# Altium PCB PCB.PcbDoc
Units mm, origin at the board's own origin, x right, y up, seen from the top; angles counter-clockwise.
Board outline 100 x 50 mm, 2 copper layers (Top Layer, Bottom Layer); 23 components, 20 nets, 52 pads, 0 vias.
Unrouted connection lines stored in the file: 32.
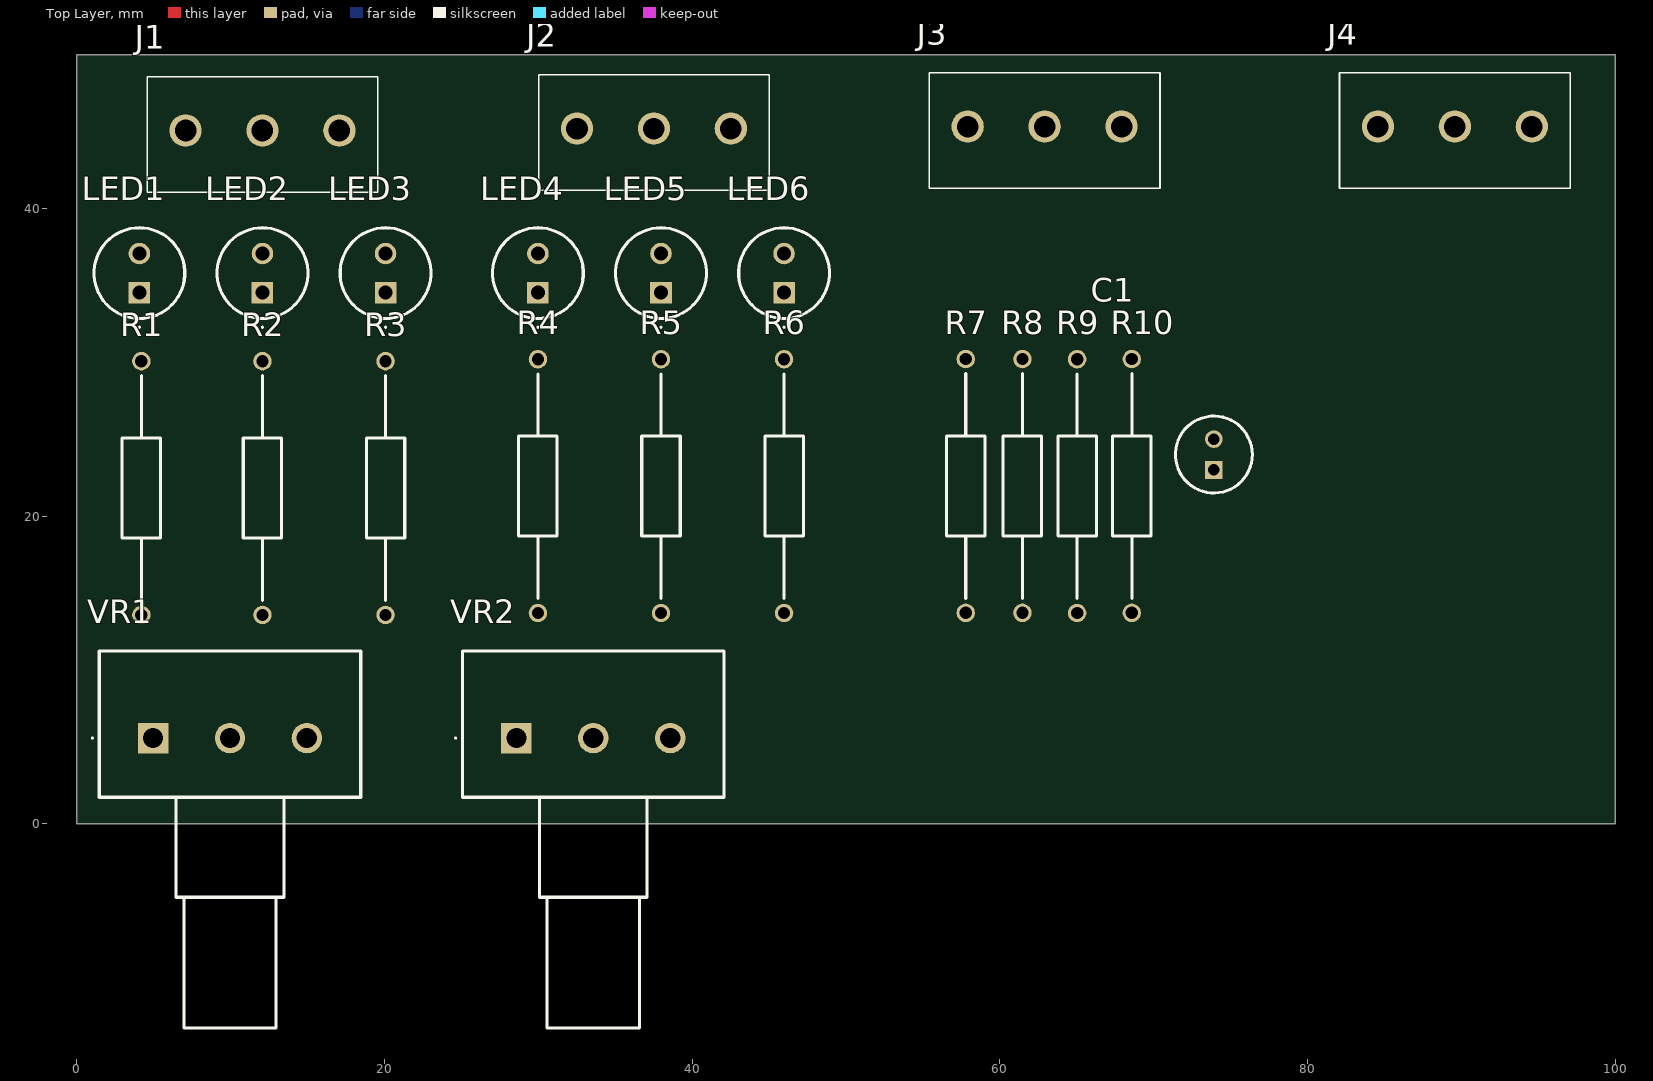
[diagram p0: Top Layer view]
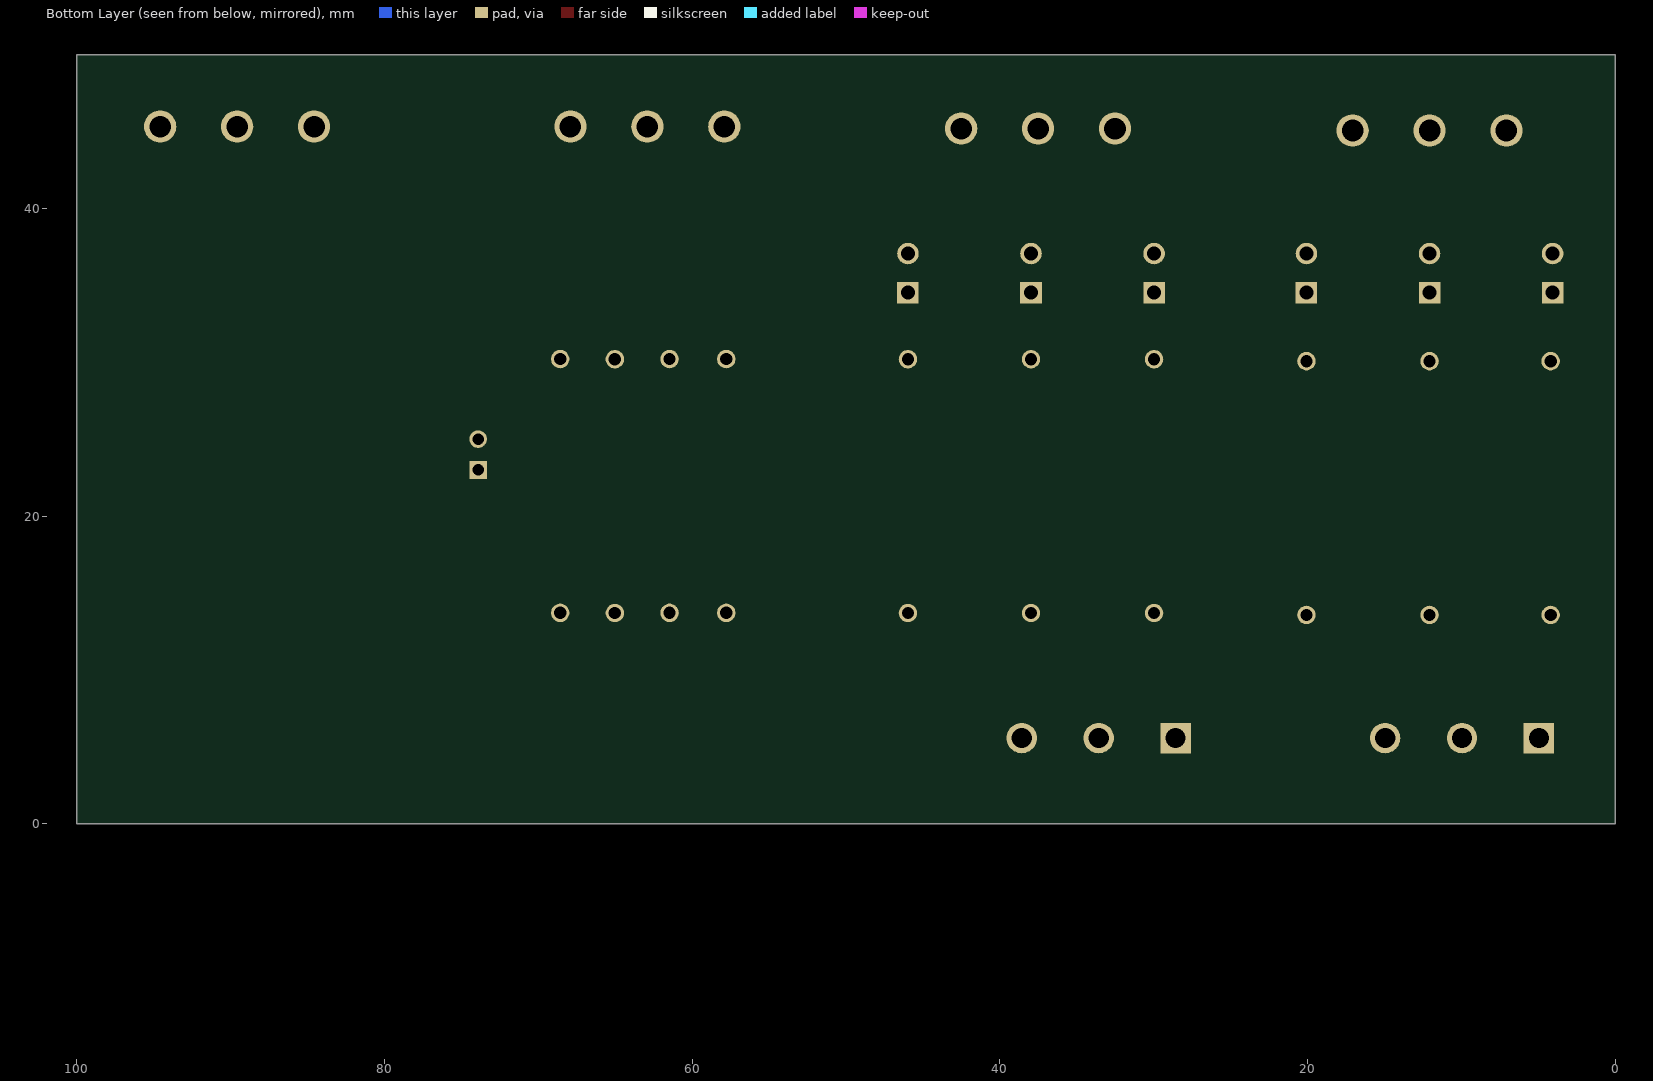
[diagram p1: Bottom Layer view, seen from below]

## Layer stack, top to bottom
Top Solder: solder mask 0.0102, Solder Resist, Dk 3.5
Top Layer: signal copper 0.0356
Dielectric 1: dielectric 0.32, FR-4, Dk 4.8
Bottom Layer: signal copper 0.0356
Bottom Solder: solder mask 0.0102, Solder Resist, Dk 3.5

## Board outline
0,0 100,0 100,50 0,50

## Design rules (kind name [scope] priority, off if disabled: settings)
Clearance [All] p1: gap=0.254 ignorepadtopadclearanceinfootprint=FALSE
PolygonConnect [All] p1: connectstyle=Relief reliefconductorwidth=0.254 reliefentries=4 polygonreliefangle="90 Angle" airgapwidth=0.254
RoutingVias [All] p1: holewidth=0.711 width=1.27 viastyle="Through Hole" minholewidth=0.711 minwidth=1.27 maxholewidth=0.711 maxwidth=1.27
SolderMaskExpansion [All] p1: expansion=0.102 istentingtop=FALSE
SupplyNets "Schematic Supply Nets" [InNet('GND')] p1: voltage=0.000
Width [All] p1: maxlimit=0.254 minlimit=0.254 preferedwidth=0.254
30 further rules are at their usual default settings.

## Components (designator, comment, footprint, x,y, rotation, side; value= is the part's Value field where it differs from the comment)
C1 "ECA-1HHG330" CAPPRD200W55D500H1200 73.914,23.019 r90 top
J1 "KF301-3P" KF3013P 17.065,45.085 r180 top
J2 "KF301-3P" KF3013P 42.512,45.212 r180 top
J3 "KF301-3P" KF3013P 67.912,45.339 r180 top
J4 "KF301-3P" KF3013P 94.582,45.339 r180 top
LED1 "WP7113ID" WP7113ID 4.064,34.544 r180 top
LED2 "WP7113ID" WP7113ID 12.065,34.544 r180 top
LED3 "WP7113ID" WP7113ID 20.066,34.544 r180 top
LED4 "WP7113ID" WP7113ID 29.972,34.544 r180 top
LED5 "WP7113ID" WP7113ID 37.973,34.544 r180 top
LED6 "WP7113ID" WP7113ID 45.974,34.544 r180 top
R1 "MRS25000C8200FCT00" RESAD1650W60L650D250 4.191,13.589 r90 top
R2 "MRS25000C8200FCT00" RESAD1650W60L650D250 12.065,13.589 r90 top
R3 "MRS25000C8200FCT00" RESAD1650W60L650D250 20.066,13.589 r90 top
R4 "MRS25000C8200FCT00" RESAD1650W60L650D250 29.972,13.716 r90 top
R5 "MRS25000C8200FCT00" RESAD1650W60L650D250 37.973,13.716 r90 top
R6 "MRS25000C8200FCT00" RESAD1650W60L650D250 45.974,13.716 r90 top
R7 "MRS25000C1402FCT00" RESAD1650W60L650D250 57.785,13.726 r90 top
R8 "MRS25000C1402FCT00" RESAD1650W60L650D250 61.468,13.726 r90 top
R9 "MRS25000C1402FCT00" RESAD1650W60L650D250 65.024,13.716 r90 top
R10 "MRS25000C1402FCT00" RESAD1650W60L650D250 68.58,30.226 r270 top
VR1 "PDB181-K415F-503B" PDB181K415F503B 4.953,5.588 r0 top
VR2 "PDB181-K415F-503B" PDB181K415F503B 28.575,5.588 r0 top (schematic designator VR?)

## Footprints (in the part's own frame and the unit in brackets; to place one, negate y for a bottom-side part, rotate by r counter-clockwise, add the part's x,y. Pads: shape width x height; smd on the part's side, far side on the other; paste and mask are expansions set on the pad)
CAPPRD200W55D500H1200 [mm]
  rect 1.15x1.15 hole 0.75: 1(0,0)
  round 1.15 hole 0.75: 2(2,0)
  silkscreen extent -1.5,-2.5 3.5,2.5, body extent -1.74,-2.75 3.75,2.75, height 12
KF3013P [mm]
  round 2.1 hole 1.4: 1(0,0) 2(5,0) 3(10,0)
  silkscreen extent -2.5,-3.5 12.5,4, body extent -2.9,-3.31 12.5,4.19, height 10.04
PDB181K415F503B [mm]
  rect 1.98x1.98 hole 1.32: 1(0,0)
  round 1.98 hole 1.32: 2(5,0) 3(10,0)
  silkscreen extent -4,-18.85 13.5,5.65, body extent -3.5,-18.85 13.49,5.65, height 21.92
RESAD1650W60L650D250 [mm]
  round 1.2 hole 0.8: 1(0,0) 2(16.5,0)
  silkscreen extent 0.95,-1.25 15.55,1.25, body extent -0.3,-1.25 10.3,1.25, height 2.55
WP7113ID [mm]
  rect 1.4x1.4 hole 0.9: 1(0,0)
  round 1.4 hole 0.9: 2(0,-2.54)
  silkscreen extent -2.95,-4.22 2.95,2.3, body extent -2.95,-4.2 2.95,1.23, height 9.98

## Part data
C1: "Capacitor Polarised", Manufacturer_Name=Panasonic, Mouser Part Number=667-ECA-1HHG330, Arrow Part Number=ECA-1HHG330, Arrow Price/Stock=https://www.arrow.com/en/products/eca-1hhg330/panasonic?region=europe, Datasheet Link=http://industrial.panasonic.com/cdbs/www-data/pdf/RDF0000/ABA0000C1215.pdf, Height=12mm, Manufacturer_Part_Number=ECA-1HHG330, Mouser Price/Stock=https://www.mouser.co.uk/ProductDetail/Panasonic/ECA-1HHG330?qs=UkbntSQVHlYh%2Fs1VDyf2Bw%3D%3D
J1 J2 J3 J4: "Connector", Manufacturer_Name="Handson Technology", Datasheet Link=http://www.handsontec.com/dataspecs/terminal%20block-5mm.pdf, Height=10mm, Manufacturer_Part_Number=KF301-3P
LED1 LED2 LED3 LED4 LED5 LED6: "LED", Manufacturer_Name=Kingbright, Mouser Part Number=604-WP7113ID, Arrow Part Number=WP7113ID, Arrow Price/Stock=https://www.arrow.com/en/products/wp7113id/kingbright?utm_currency=USD&region=nac, Datasheet Link=https://www.digikey.ph/en/products/detail/kingbright/WP7113ID/1747663, Height=9.85mm, Manufacturer_Part_Number=WP7113ID, Mouser Price/Stock=https://www.mouser.co.uk/ProductDetail/Kingbright/WP7113ID?qs=hyavMCx%252BcmDJhCThgY7pfQ%3D%3D
R1 R2 R3 R4 R5 R6: "Resistor", Manufacturer_Name=Vishay, Mouser Part Number=594-MRS25000C8200FCT, Arrow Part Number=MRS25000C8200FCT00, Arrow Price/Stock=https://www.arrow.com/en/products/mrs25000c8200fct00/vishay, Datasheet Link=http://www.vishay.com/docs/28724/mrs16m25.pdf, Manufacturer_Part_Number=MRS25000C8200FCT00, Mouser Price/Stock=https://www.mouser.co.uk/ProductDetail/Vishay-BC-Components/MRS25000C8200FCT00?qs=fB02Kyu8Fe%2F0RazdCg45Fg%3D%3D
R7 R8 R9 R10: "Resistor", Manufacturer_Name=Vishay, Datasheet Link=http://www.vishay.com/docs/28724/mrs16m25.pdf, Manufacturer_Part_Number=MRS25000C1402FCT00
VR1 VR2: "Variable Resistor", Manufacturer_Name=Bourns, Mouser Part Number=652-PDB181K415F503B, Datasheet Link=https://componentsearchengine.com//PDB181-K415F-503B.pdf, Height=16.5mm, Manufacturer_Part_Number=PDB181-K415F-503B, Mouser Price/Stock=https://www.mouser.co.uk/ProductDetail/Bourns/PDB181-K415F-503B?qs=fgHA1UgJI8CfxbrAh7xxKw%3D%3D

## Nets (pads, with @x,y where several pads share a name; then routed paths per layer and width w, separated by ;. In a path a pad name is that pad's centre, name@x,y a point inside that pad or via, vN(x,y) a via of type N, cw(c..) or ccw(c..) an arc to the next point about the centre after c; other vN are vias at no path point)
GND: C1.2 J3.1 R1.1 R2.1 R3.1 R4.1 R5.1 R6.1 R10.1 VR1.1 VR2.1
NetC1_1: C1.1 J4.1 R9.1 R10.2
NetJ1_1: J1.1 LED3.2
NetJ1_2: J1.2 LED2.2
NetJ1_3: J1.3 LED1.2
NetJ2_1: J2.1 LED6.2
NetJ2_2: J2.2 LED5.2
NetJ2_3: J2.3 LED4.2
NetJ3_2: J3.2 R9.2
NetJ3_3: J3.3 R7.2 R8.2
NetJ4_2: J4.2 VR2.2
NetJ4_3: J4.3 VR1.2
NetLED1_1: LED1.1 R1.2
NetLED2_1: LED2.1 R2.2
NetLED3_1: LED3.1 R3.2
NetLED4_1: LED4.1 R4.2
NetLED5_1: LED5.1 R5.2
NetLED6_1: LED6.1 R6.2
NetR7_1: R7.1 VR1.3
NetR8_1: R8.1 VR2.3